# EAGLE board Volterra Extruder_1 Board (EAGLE 9.1.3)
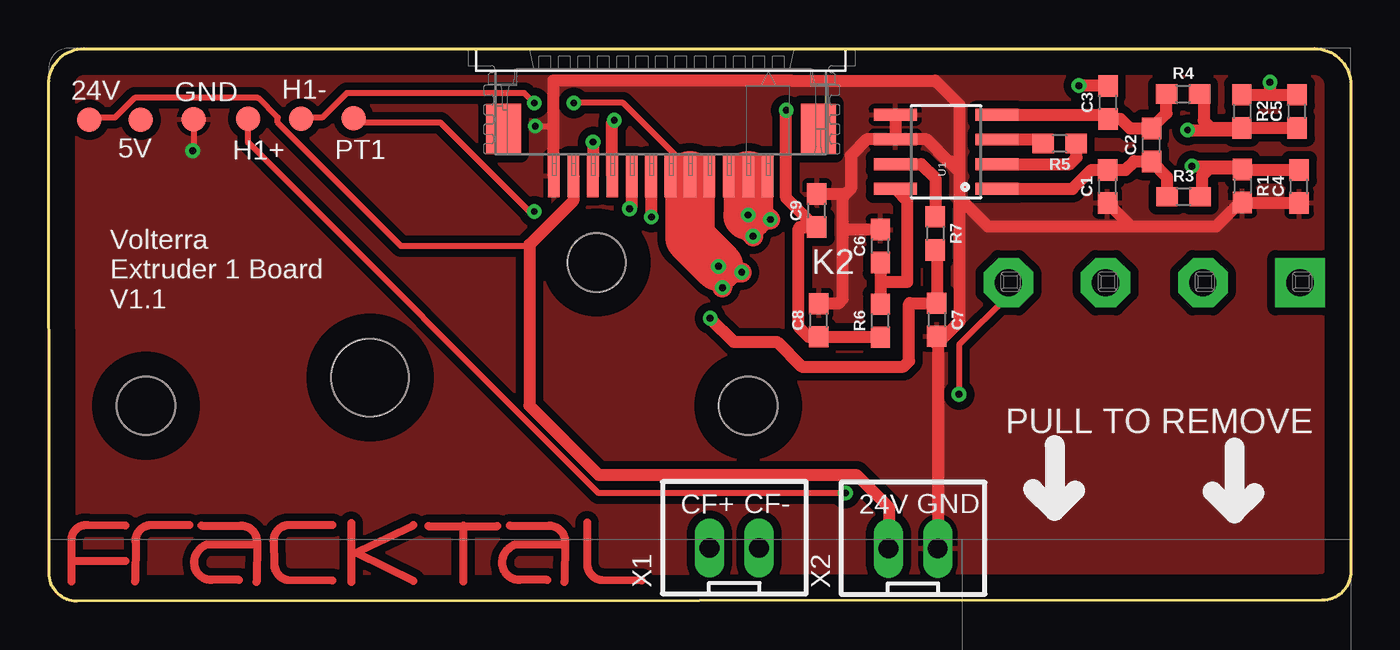
[diagram p0: board, top side]
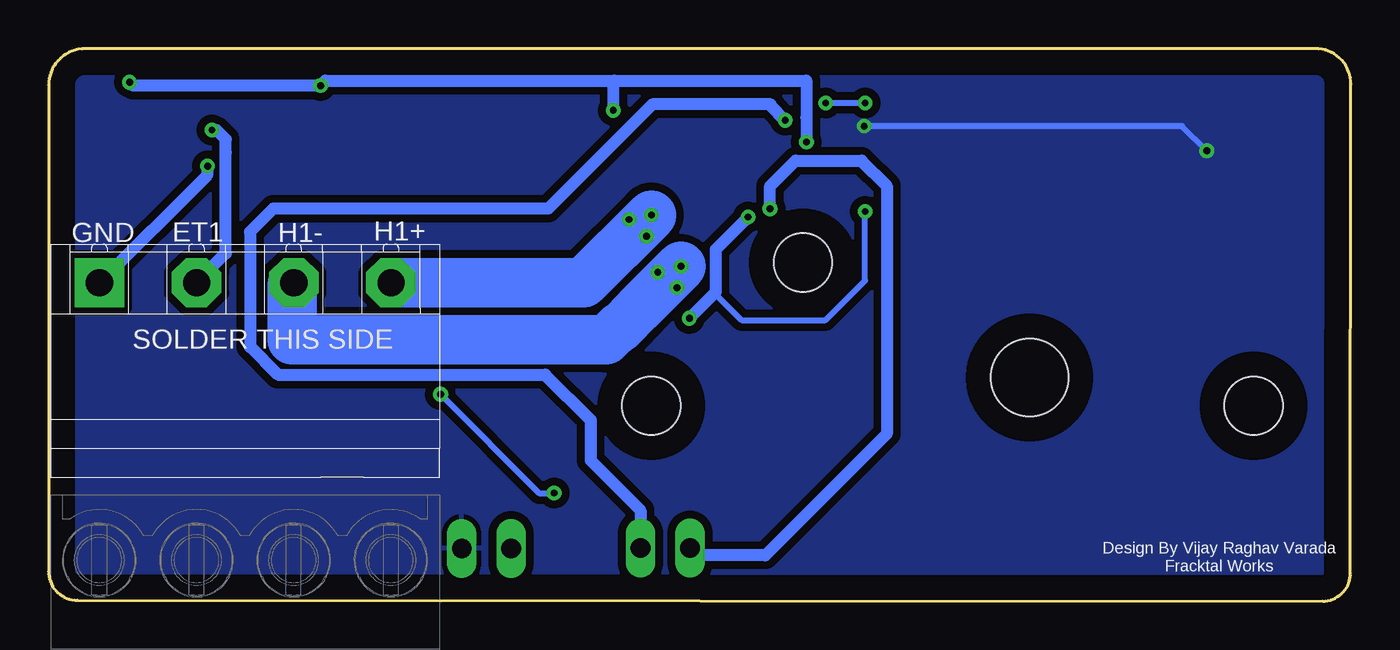
[diagram p1: board, bottom side, seen from below]

Size 67.01 x 28.42 mm. Coordinates in mm from the lower left corner, seen from the top.
Outline: 0,26.59 arc-90 1.83,28.42 65.13,28.42 arc-90 67.01,26.54 67.01,1.52 arc-90 65.53,0.05 1.45,0 arc-90 0.03,1.45 0,26.59
Copper layers (1*16): Top 0.035mm / dielectric 1.5mm / Bottom 0.035mm
Design rules "LionCircuits": minimum track width 8mil, minimum drill 0.35mm, track to track 8mil, track to pad 8mil, pad to pad 8mil, via to via 8mil, smd to smd 8mil, copper to edge 50mil, drill to drill 10mil, minimum pad ring 10mil, minimum via ring 8mil, stop-mask expansion 4mil, vias tented up to drill 0mil, thermal gap 10mil
Net classes: 0 default: width 0.305 mm
Holes 4 mm at 16.54,11.51
Holes 3 mm at 5,10.06 28.19,17.42 35.99,10.06

## Footprints (pad centres in the part's own frame; a part is rotated, then mirrored left to right if it is on the bottom)
0603 = smd 1.1 x 1: 1 -0.85,0; 2 0.85,0
TERMINALBLOCK/TOYO/4PIN/5MMPITCH = drill 1.4 pad 2.54 square: 1 0,0 | drill 1.4 pad 2.54 octagon: 2 5,0; 3 10,0; 4 15,0
68611214122 = smd 0.6 x 2.2: 1 -8.5,1.1; 2 -7.5,1.1; 3 -6.5,1.1; 4 -5.5,1.1; 5 -4.5,1.1; 6 -3.5,1.1; 7 -2.5,1.1; 8 -1.5,1.1; 9 -0.5,1.1; 10 0.5,1.1; 11 1.5,1.1; 12 2.5,1.1 | smd 1.8 x 2.6: Z1 -11.1,-1.3; Z2 5.1,-1.3
PAD.03X.05 = smd 1.27 x 1.27: P$1 0,0
SOIC-8 = smd 0.61 x 2.21: 1 -1.905,-2.616; 2 -0.635,-2.616; 3 0.635,-2.616; 4 1.905,-2.616; 5 1.905,2.616; 6 0.635,2.616; 7 -0.635,2.616; 8 -1.905,2.616
JST-XH-02-PACKAGE-LONG-PAD = drill 1.016 long: 1 -1.27,0; 2 1.27,0

## Placement (x,y rotation side)
C1  100nF  [0603]  54.48,21.34 90 top
C2  1uF  [0603]  56.74,23.47 90 top
C3  100nF  [0603]  54.51,25.65 90 top
C4  100nF  [0603]  64.34,21.34 90 top
C5  100nF  [0603]  64.24,25.2 90 top
C6  100nF  [0603]  42.8,18.26 90 top
C7  10nF  [0603]  45.69,14.48 270 top
C8  10uF  [0603]  39.62,14.45 90 top
C9  10uF  [0603]  39.52,20.09 90 top
J1  TERMINALBLOCK/4PIN/5MMPITCH  [TERMINALBLOCK/TOYO/4PIN/5MMPITCH]  64.39,16.38 0 bottom
K2  68611214122  [68611214122]  28.5,22.99 180 top
R1  2.2k  [0603]  61.42,21.36 270 top
R2  2.2k  [0603]  61.39,25.2 270 top
R3  10k  [0603]  58.39,20.8 0 top
R4  10k  [0603]  58.37,26.09 0 top
R5  5.49k  [0603]  52.02,23.55 180 top
R6  100R  [0603]  42.8,14.43 90 top
R7  100R  [0603]  45.62,18.92 270 top
TP1  TEST-POINT3X5  [PAD.03X.05]  10.26,24.82 0 top
TP2  TEST-POINT3X5  [PAD.03X.05]  13,24.82 0 top
TP6  TEST-POINT3X5  [PAD.03X.05]  2.08,24.77 0 top
TP7  TEST-POINT3X5  [PAD.03X.05]  7.47,24.79 0 top
TP8  TEST-POINT3X5  [PAD.03X.05]  15.7,24.84 0 top
TP9  TEST-POINT3X5  [PAD.03X.05]  4.75,24.77 0 top
U1  INA826SOIC-08  [SOIC-8]  46.18,23.11 90 top
U$1  [FRACKTALLOGO]  13.16,0.91 0 top
X1  CF  [JST-XH-02-PACKAGE-LONG-PAD]  35.28,2.74 0 top
X2  AOF  [JST-XH-02-PACKAGE-LONG-PAD]  44.48,2.72 0 top

## Library data of the parts
C1-C9 = SparkFun-Capacitors; PROD_ID: CAP-00810
J1 U$1 = FracktalWorks_Eagle_Library
K2 = Wurth_Elektronik_Electromechanic_FPC_Connectors_&_Flat_Flexible_Cable_rev15b
R1-R7 = SparkFun-Resistors; PROD_ID: RES-09119
TP1 TP2 TP6-TP9 = SparkFun-Connectors
U1 = smd-footprints
X1 X2 = Rembrandt Electronics - JST XH Connectors v1-0

## Nets
3V3: C3.2 C5.2 C8.1 C9.1 K2.10 R2.1 R6.1
5V: TP9.P$1
24V: K2.11 TP6.P$1 X2.1
CF+: K2.8 X1.1
CF-: K2.9 X1.2
GND: C1.1 C4.1 C6.2 C7.2 C8.2 C9.2 K2.12 R1.2 TP7.P$1 U1.5 U1.6 X2.2
H1+: J1.4 K2.1 K2.2 K2.3 TP1.P$1
H1-: J1.3 K2.4 K2.5 K2.6 TP2.P$1
IN+: C5.1 J1.2 R2.2 R4.2
IN-: C4.2 J1.1 R1.1 R3.2
N$1: R5.1 U1.2
N$2: R5.2 U1.3
N$3: C1.2 C2.1 R3.1 U1.1
N$4: C2.2 C3.1 R4.1 U1.4
N$5: C6.1 R6.2 U1.8
N$8: R7.1 U1.7
PT1: C7.1 K2.7 R7.2 TP8.P$1

## Tracks (layer width: path | path; a pad name or v marks a point on that pad's centre or on a via)
3V3  (via drill 0.35)
  Top 0.61: R2.1 62.74,26.05 | 62.74,26.05 C5.2 | C3.2 53.02,26.5 v53.01,26.52 | v62.84,26.7 62.84,26.15 62.74,26.05 | R6.1 42.77,13.6 C8.1 39.1,13.6 38.58,14.12 38.58,19.18 38.65,19.24 C9.1 39.45,19.24 37.95,20.75 v37.95,25.25 | v28.02,23.62 28.02,21.9 K2.10
  Bottom 0.61: v62.84,26.7 62.66,26.52 v53.01,26.52 52.76,26.77 37.9,26.77 | 37.9,26.77 28.02,26.77 28.02,24.87 v28.02,23.62 | v37.95,25.25 37.95,26.72 37.9,26.77
24V
  Top 0.305: TP6.P$1 2.13,24.87 3.4,24.87 4.42,25.88 10.77,25.88 11.79,24.87 11.79,24.61 18.14,18.26 24.49,18.26 24.74,18.26
  Top 0.61: X2.1 43.23,2.74 43.23,4.83 41.55,6.5 28.3,6.5 24.74,10.06 24.74,18.26 24.74,18.34 27,20.6 K2.11
CF+  (via drill 0.35)
  Top 0.61: K2.8 30,20.3 v29.89,20.18
  Bottom 0.61: v29.89,20.18 29.89,21.34 28.57,22.66 25.17,22.66 23.88,21.36 23.88,8.61 30.12,2.36 33.63,2.36 X1.1
CF-  (via drill 0.35)
  Top 0.61: K2.9 29,24.63 v29.11,24.74
  Bottom 0.61: v29.11,24.74 29.84,25.48 29.84,25.55 35.94,25.55 41.3,20.19 55.45,20.19 56.64,19 56.64,13.08 55.22,11.66 41.45,11.66 39.12,9.32 39.12,7.24 36.55,4.67 X1.2
GND  (via drill 0.35)
  Top 0.305: TP7.P$1 7.47,23.22 v7.42,23.16 | v25.04,24.43 25.88,24.43 25.96,24.36
  Top 0.61: C4.1 61.44,20.49 R1.2 61.3,20.51 60.07,19.28 55.69,19.28 | C1.1 55.69,19.28 | U1.5 U1.6 | U1.6 42.09,23.75 41.27,22.94 41.27,21.21 41.01,20.94 | 41.01,20.94 40.78,20.94 C9.2 | C8.2 40.63,15.3 40.87,15.54 40.87,19.08 | 38.2,26.77 25.96,26.77 25.96,24.87 25.96,24.36 25.96,21.93 K2.12 | 41.01,20.94 40.87,20.8 40.87,19.08 | C7.2 45.69,13.41 45.69,13.21 45.75,13.26 | 38.2,26.77 | 38.2,26.77 45.62,26.77 46.86,25.53 | 46.86,25.53 | 46.86,25.53 | 46.86,25.53 46.86,22.61 | 46.86,22.61 46.86,20.75 | 46.86,20.75 48.34,19.28 55.69,19.28 | 46.86,20.75 46.86,14.38 45.75,13.26 | 45.75,13.26 X2.2 | 46.86,22.61 46.33,22.61 | U1.6 45.19,23.75 46.33,22.61 | 46.33,22.61 46.86,22.07 46.86,20.75 | C6.2 40.91,19.11 40.87,19.08
  Bottom 0.305: v7.42,23.16 8.69,24.43 v25.04,24.43
  pour Top (isolate 0.406): 0.15,28.27 66.98,28.27 66.98,0.05 0.15,0.05
  pour Bottom (isolate 0.406): 0.15,28.3 66.98,28.3 66.98,0.08 0.15,0.08
H1+  (via drill 0.35)
  Top 0.305: v41,5.56 28.3,5.56 10.26,23.6 10.26,24.61 TP1.P$1 | v46.84,10.64 46.84,13.18 49.38,15.72 49.38,16.23 J1.4
  Top 0.61: K2.3 K2.2 K2.1
  Top 1.016: v36.25,18.77 35.99,19.02 v35.99,19.86 36.91,19.86 v37.13,19.63
  Top 2.54: K2.2 v36,19.87 v35.99,19.86
  Bottom 0.305: v41,5.56 41.76,5.56 v46.84,10.64
  Bottom 2.54: v35.99,19.86 39.47,16.38 J1.4
H1-  (via drill 0.35)
  Top 0.305: v24.99,25.63 24.49,26.14 15.34,26.14 14.07,24.87 13.06,24.87 TP2.P$1 | v27.03,25.63 29.57,25.63 32.36,22.83 K2.5
  Top 0.61: K2.4 K2.5 K2.6
  Top 1.016: v34.67,16.13 34.67,17.02 v34.47,17.22 34.77,16.92 v35.66,16.92
  Top 2.54: K2.5 33,18.69 v34.47,17.22
  Bottom 0.305: v27.03,25.63 v24.99,25.63
  Bottom 2.54: v34.47,17.22 36.7,14.99 37.59,14.1 37.67,14.1 38.33,13.44 54.48,13.44 54.48,16.29 J1.3
IN+  (via drill 0.35)
  Top 0.61: R4.2 59.44,25.87 59.44,24.71 59.8,24.35 R2.2 | R2.2 C5.1 | v58.6,24.23 61.28,24.23 R2.2
  Bottom 0.61: J1.2 57.89,17.89 57.89,23.09 57.89,23.75 58.37,24.23 v58.6,24.23
IN-  (via drill 0.35)
  Top 0.61: R3.2 59.36,20.92 59.36,21.89 59.74,22.28 61.35,22.28 R1.1 | C4.2 61.44,22.19 R1.1 | v58.83,22.38 61.25,22.38 R1.1
  Bottom 0.61: J1.1 58.83,21.95 v58.83,22.38
N$1
  Top 0.61: U1.2 52.55,22.48 52.88,22.81 52.87,22.82 R5.1
N$2
  Top 0.61: U1.3 50.97,23.75 R5.2
N$3
  Top 0.61: U1.1 52.68,21.21 53.66,22.19 C1.2 55.41,22.19 55.85,22.63 55.87,22.62 C2.1 57.54,21.82 R3.1
N$4
  Top 0.61: U1.4 54.29,25.02 C3.1 55.16,24.8 55.64,24.32 C2.2 57.52,25.1 R4.1
N$5
  Top 0.61: C6.1 42.8,16.46 | 42.8,16.46 R6.2 | U1.8 44.17,20.6 44.17,16.41 42.85,16.41 42.8,16.46
N$8
  Top 0.61: U1.7 44.91,22.48 45.62,21.77 R7.1
PT1  (via drill 0.35)
  Top 0.305: v24.99,20.04 24.74,20.04 20.17,24.61 15.85,24.61 TP8.P$1
  Top 0.61: R7.2 45.69,18 C7.1 44.31,15.33 44.27,15.29 44.27,12.34 43.99,12.06 38.74,12.06 37.47,13.34 35.25,13.34 v34.04,14.55 | K2.7 31,19.78 v31.01,19.76
  Bottom 0.305: v24.99,20.04 24.99,16.48 27.03,14.45 31.34,14.45 32.61,15.72 32.74,15.85
  Bottom 0.61: v31.01,19.76 32.69,18.08 32.69,15.9 32.74,15.85 v34.04,14.55

## Text on the board
tNames: 24V | H1- | GND | 5V | PT1 | H1+ | Volterra / Extruder 1 Board / V1.1 | PULL TO REMOVE | CF+ | CF- | 24V | GND
bNames: H1+ | H1- | ET1 | GND | SOLDER THIS SIDE | Design By Vijay Raghav Varada / Fracktal Works